# Altium PCB SENSORS.PcbDoc
Units mm, origin at the board's own origin, x right, y up, seen from the top; angles counter-clockwise.
Board outline 58.03 x 58.03 mm, 2 copper layers (Top Layer, Bottom Layer); 6 components, 14 nets, 21 pads, 0 vias.
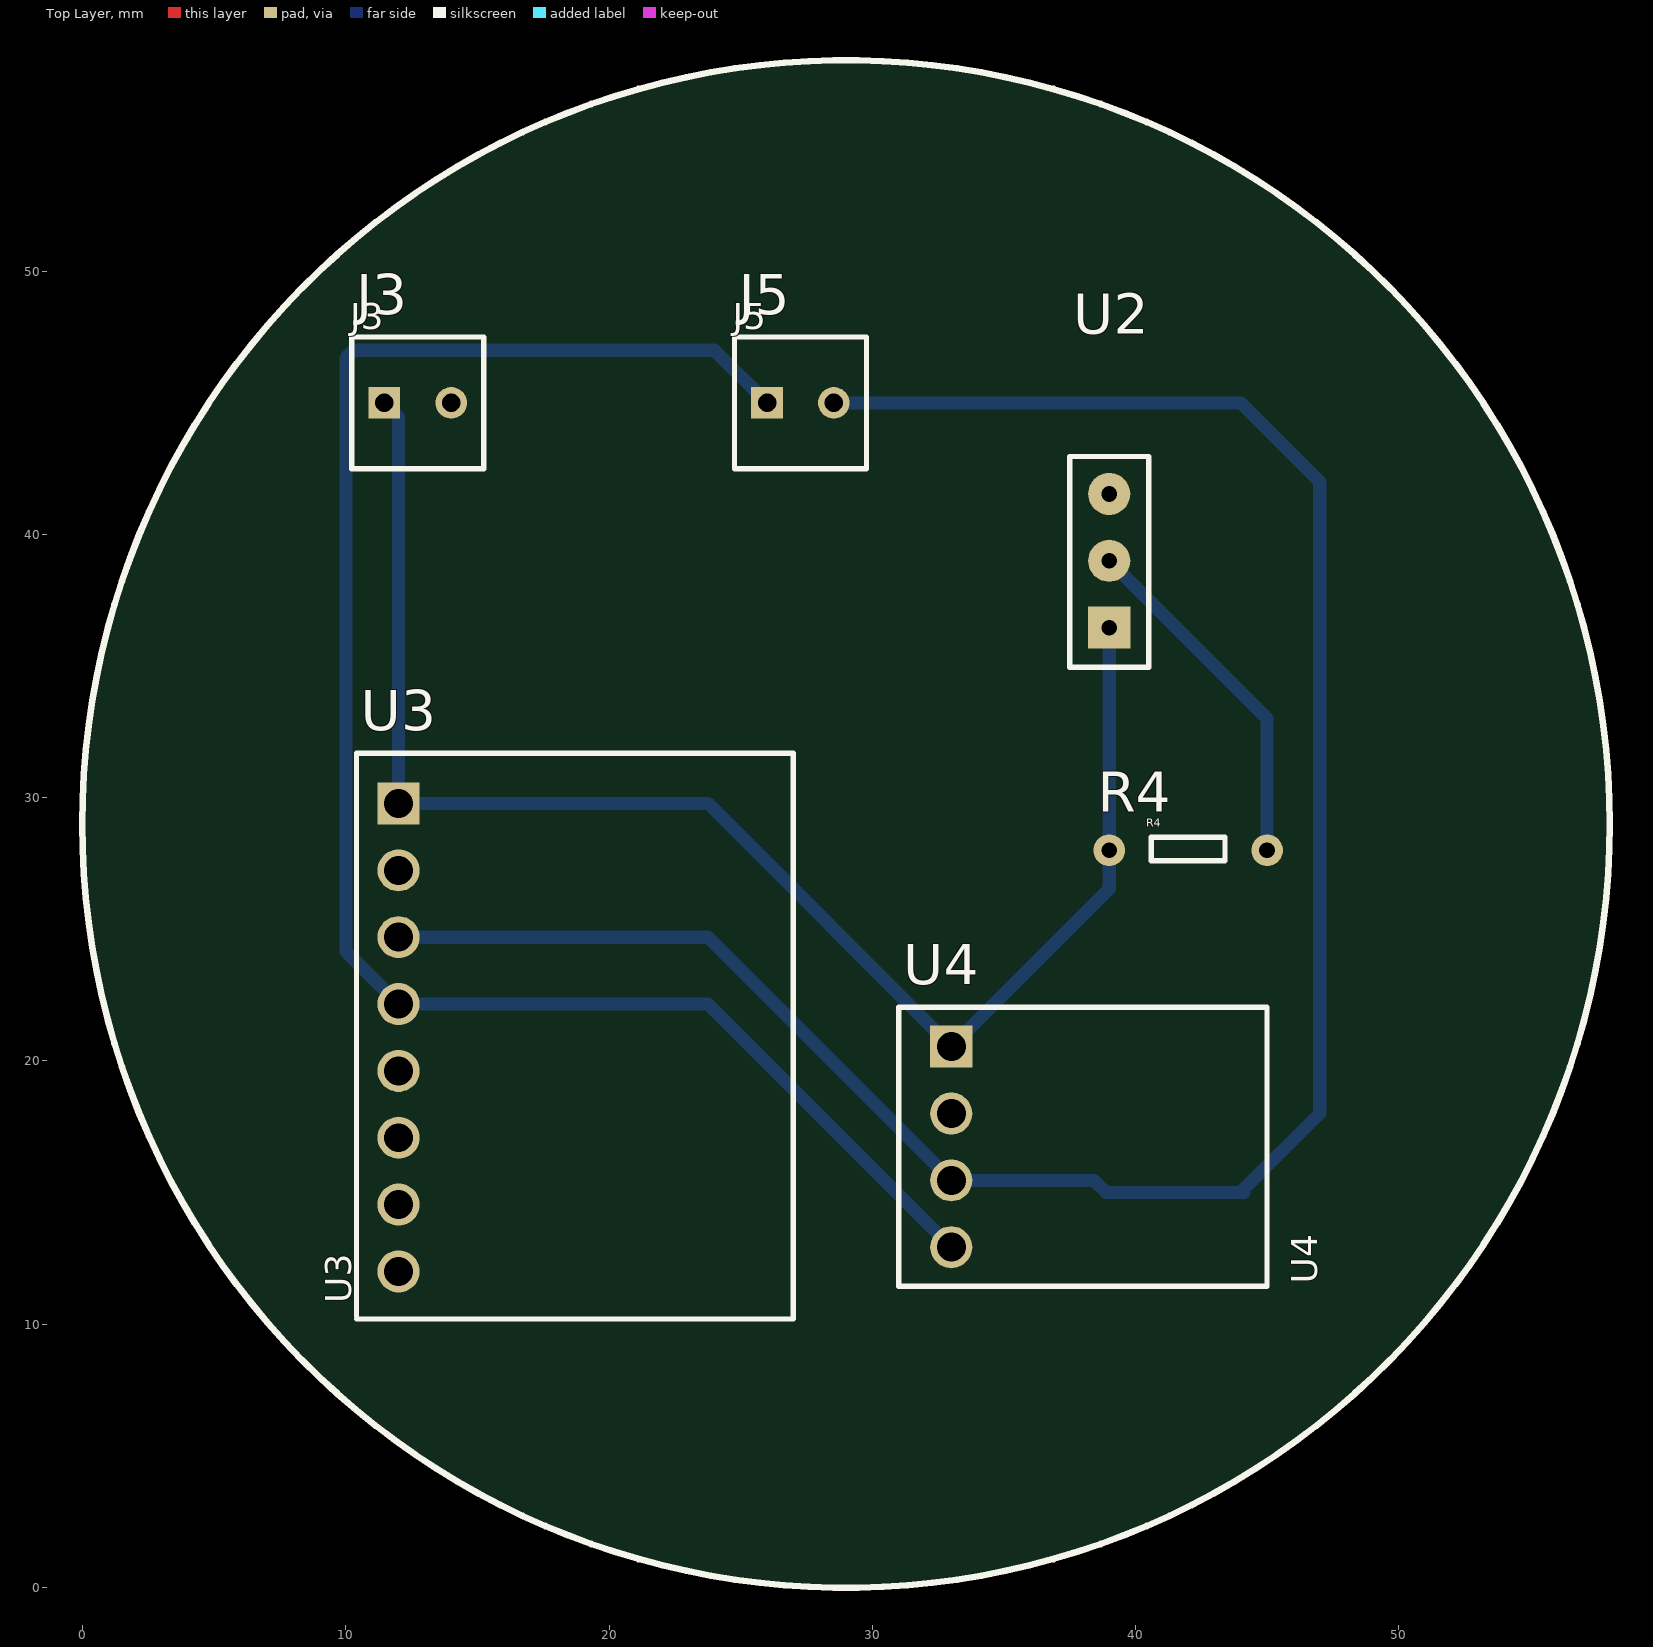
[diagram p0: Top Layer view]
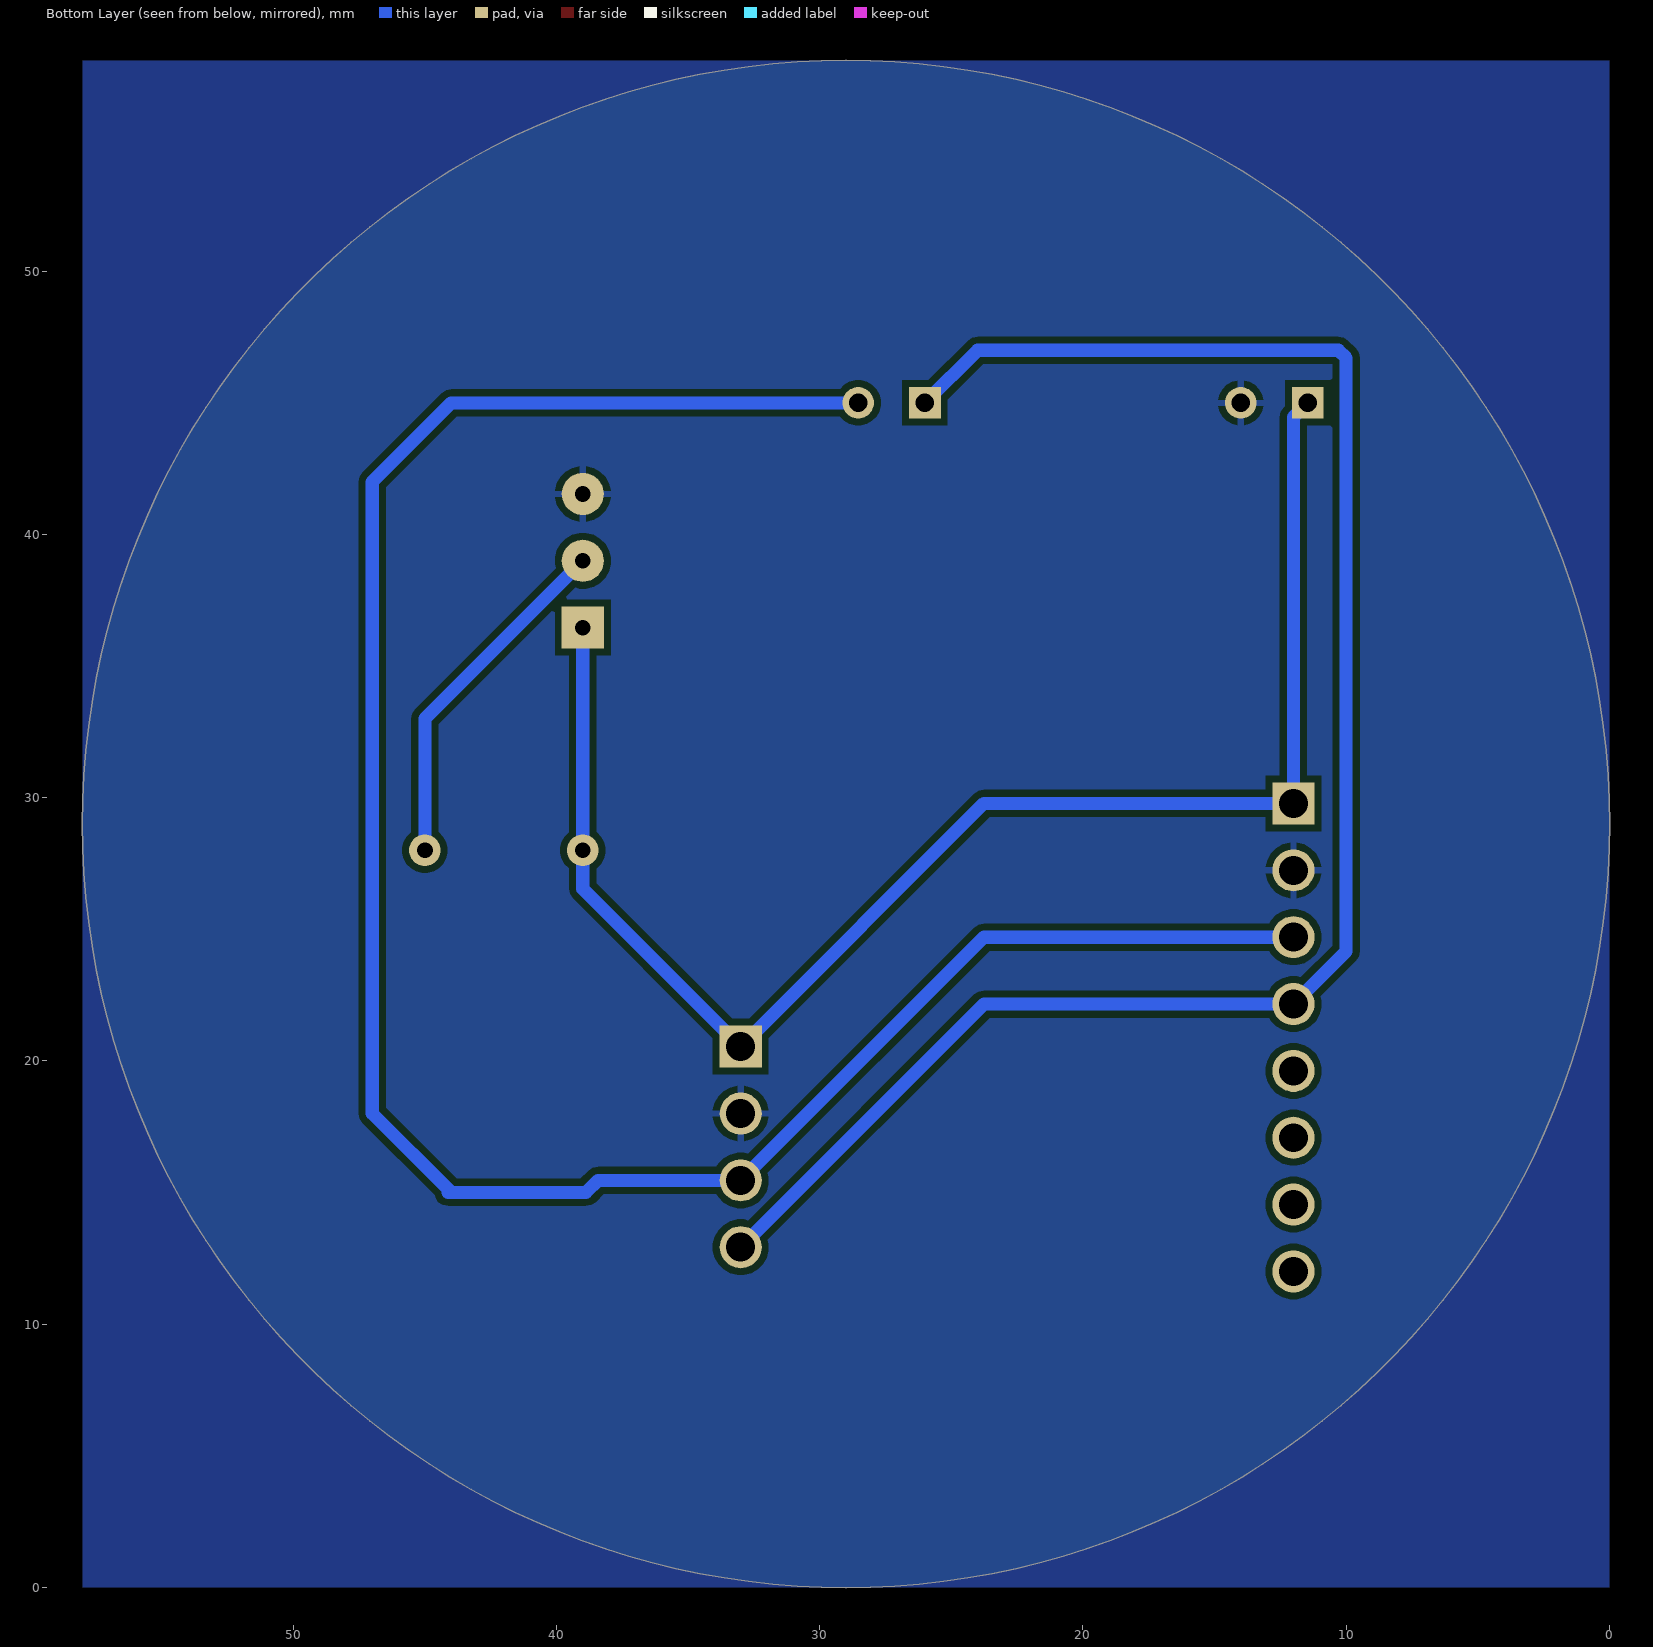
[diagram p1: Bottom Layer view, seen from below]
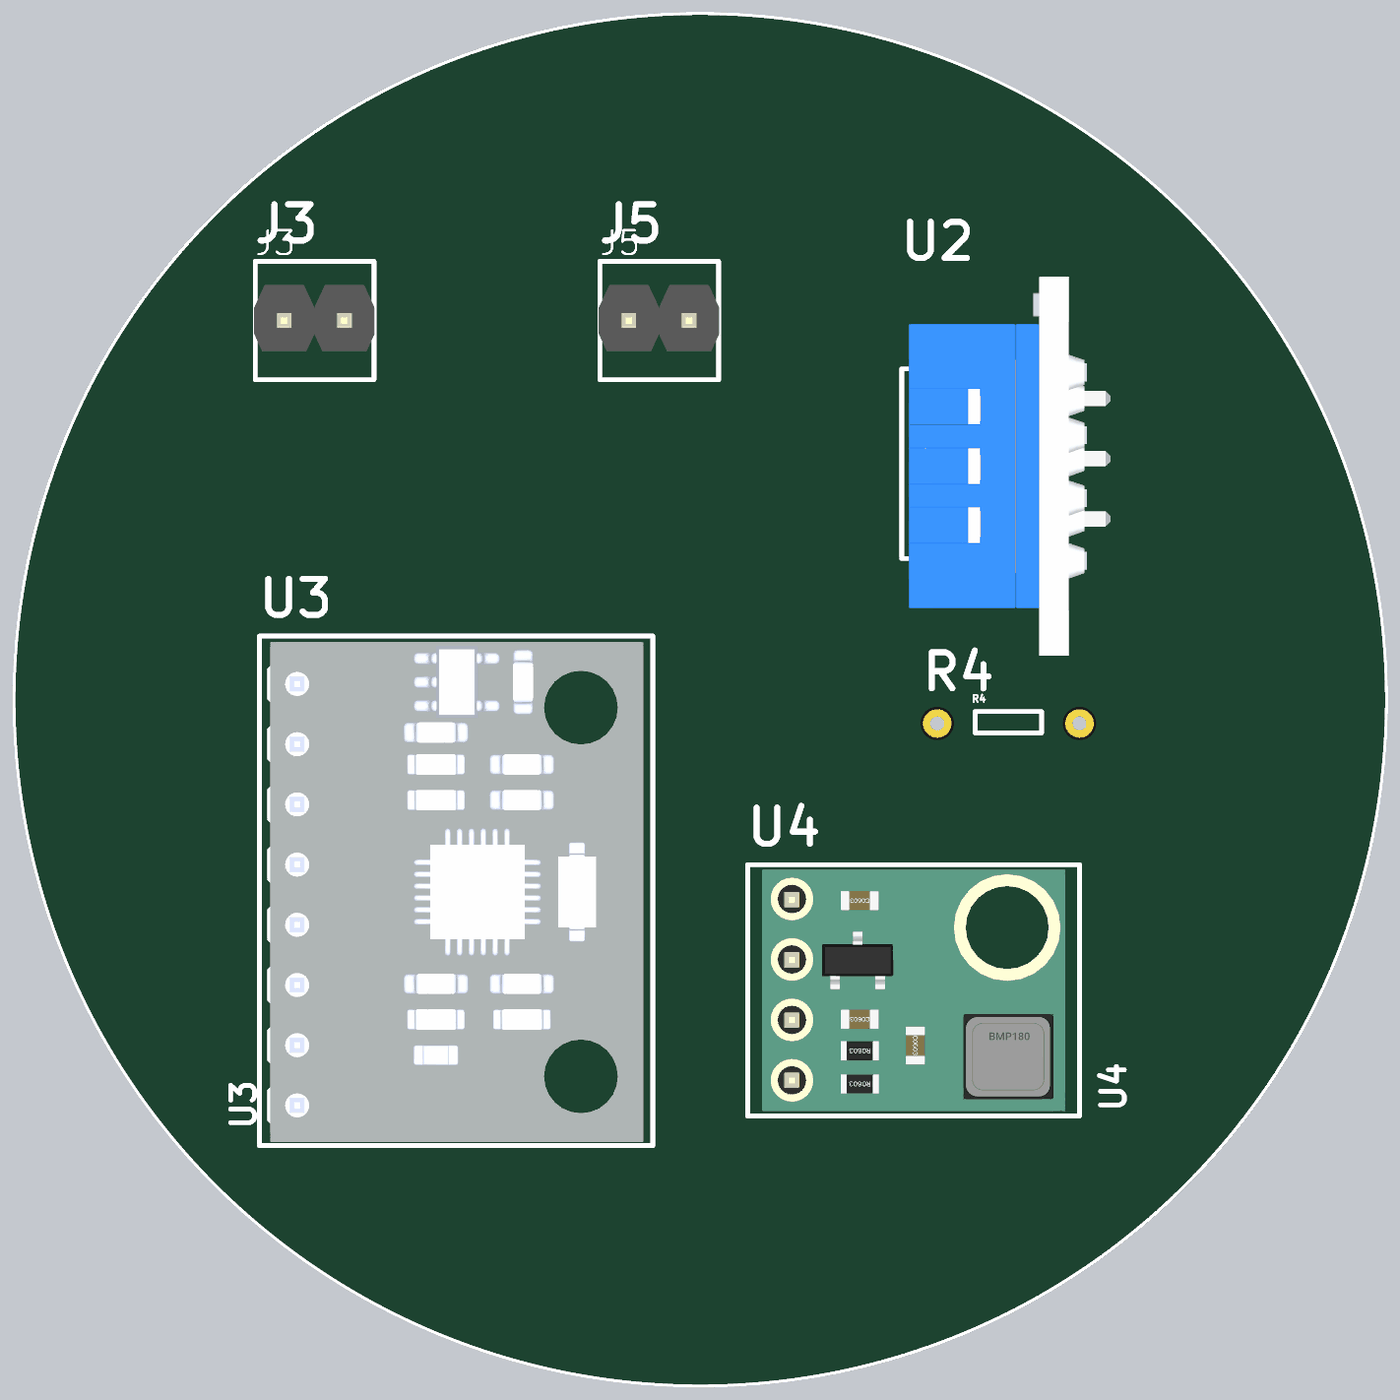
[diagram p2: 3D render of the assembled board from above, using the file's embedded part models]

## Layer stack, top to bottom
Top Solder: solder mask 0.0102, Solder Resist, Dk 3.5
Top Layer: signal copper 0.0356
Dielectric 1: dielectric 0.32, FR-4, Dk 4.8
Bottom Layer: signal copper 0.0356
Bottom Solder: solder mask 0.0102, Solder Resist, Dk 3.5

## Board outline
29,-0.017 cw(c29,29) -0.017,29 cw(c29,29) 29,58.017 cw(c29,29) 58.017,29 cw(c29,29)

## Design rules (kind name [scope] priority, off if disabled: settings)
Clearance [All] p1: gap=0.254 ignorepadtopadclearanceinfootprint=FALSE except(0: Arc-Hole Track-Hole SMDPad-Hole THPad-Hole Via-Hole Fill-Hole Poly-Hole Region-Hole Text-Hole)
PolygonConnect [All] p1: connectstyle=Relief reliefconductorwidth=0.254 reliefentries=4 polygonreliefangle="90 Angle" airgapwidth=0.254
RoutingVias [All] p1: holewidth=0.711 width=1.27 viastyle="Through Hole" minholewidth=0.711 minwidth=1.27 maxholewidth=0.711 maxwidth=1.27
SolderMaskExpansion [All] p1: expansion=0.102 istentingtop=FALSE
Width [All] p1: maxlimit=0.5 minlimit=0.5 preferedwidth=0.5
30 further rules are at their usual default settings.

## Components (designator, comment, footprint, x,y, rotation, side; value= is the part's Value field where it differs from the comment)
J3 "2x1_CONN" CONN2x1_2.54mm 11.46,45 r0 top
J5 "2x1_CONN" CONN2x1_2.54mm 26,45 r0 top
R4 "330R" "THT RESISTOR" 39,28 r0 top
U2 "DHT11" DHT11 39,36.46 r180 top
U3 "MPU6050" MPU6050 12,20.89 r0 top
U4 "BMP180" BMP180 33,20.54 r0 top

## Footprints (in the part's own frame and the unit in brackets; to place one, negate y for a bottom-side part, rotate by r counter-clockwise, add the part's x,y. Pads: shape width x height; smd on the part's side, far side on the other; paste and mask are expansions set on the pad)
BMP180 [mm]
  rect 1.6x1.6 hole 1.1: 1(0,0)
  round 1.6 hole 1.1: 2(0,-2.54) 3(0,-5.08) 4(0,-7.62)
  silkscreen extent -2,-9.1 12,1.5, body extent -1.4,-8.9 11.4,1.3, height 5.6
CONN2x1_2.54mm [mm]
  rect 1.2x1.2 hole 0.7: 1(0,0)
  round 1.2 hole 0.7: 2(2.54,0)
  silkscreen extent -1.23,-2.5 3.77,2.5, body extent -1.28,-1.3 3.8,1.5, height 8.06
DHT11 [mm]
  rect 1.6x1.6 hole 0.6: 1(0,0)
  round 1.6 hole 0.6: 2(0,-2.54) 3(0,-5.08)
  silkscreen extent -1.5,-6.5 1.5,1.5, body extent -7.3,-10.4 1.2,5.6, height 21.36
MPU6050 [mm] "6DOF IMU"
  rect 1.6x1.6 hole 1.1: 1(0,8.89)
  round 1.6 hole 1.1: 2(0,6.35) 3(0,3.81) 4(0,1.27) 5(0,-1.27) 6(0,-3.81) 7(0,-6.35) 8(0,-8.89)
  silkscreen extent -1.6,-10.7 15,10.8, body extent -1.28,-10.55 14.6,10.55, height 6.11
"THT RESISTOR" [mm]
  round 1.2 hole 0.6: 1(0,0) 2(6,0)
  silkscreen extent 1.6,-0.4 4.4,0.5

## Part data
J3 J5: library part "CONN 2x1", "THT 2x1 2.54mm CONN"
R4: library part Resistor, "Through-hole resistor"
U2: "Humidity and temperature sensor"
U3: "6DOF IMU sensor"
U4: "Bosch Pressure Sensor"

## Nets (pads, with @x,y where several pads share a name; then routed paths per layer and width w, separated by ;. In a path a pad name is that pad's centre, name@x,y a point inside that pad or via, vN(x,y) a via of type N, cw(c..) or ccw(c..) an arc to the next point about the centre after c; other vN are vias at no path point)
3V3: 
3V3a: J3.1 R4.1 U2.1 U3.1 U4.1 | length 58.7
  Bottom Layer w0.5: J3.1 12,44.46 U3.1 23.76,29.78 U4.1 39,26.54 R4.1 U2.1
32: 
GND: 
GNDa: J3.2 U2.3 U3.2 U4.2
NetB1_2: 
NetC1_2: 
NetC2_2: 
NetD1_1: 
NetD2_2: 
NetR1_2: 
NetR4_2: R4.2 U2.2 | length 13.5
  Bottom Layer w0.5: U2.2 45,33 R4.2
SCL: J5.2 U3.3 U4.3 | length 84
  Bottom Layer w0.5: U3.3 23.76,24.7 U4.3 38.419,15.46 38.879,15 ; J5.2 44,45 47,42 47,18 44,15 ; 39,15 44.121,15
SDA: J5.1 U3.4 U4.4 | length 67.2
  Bottom Layer w0.5: J5.1 24,47 10.293,47 10,46.707 10,24.16 U3.4 23.76,22.16 U4.4
pads on no net: U3.5 U3.6 U3.7 U3.8

## Polygon pours and split planes (outlines as drawn)
GNDa on Bottom Layer "GNDA_L02_P000" (solid, pour order 0): 0,58 58,58 58,0 0,0

## Silkscreen, mask and mechanical layers (free items; w line width, h text height)
Top Overlay:
  circle w0.254: c29,29 r29.017